# Altium PCB bq RepRap LCD SmartController_ConnectorAdapter.PcbDoc
Units mm, origin at the board's own origin, x right, y up, seen from the top; angles counter-clockwise.
Board outline 62.93 x 20.9 mm, 2 copper layers (Top Layer, Bottom Layer); 4 components, 17 nets, 48 pads, 6 vias.
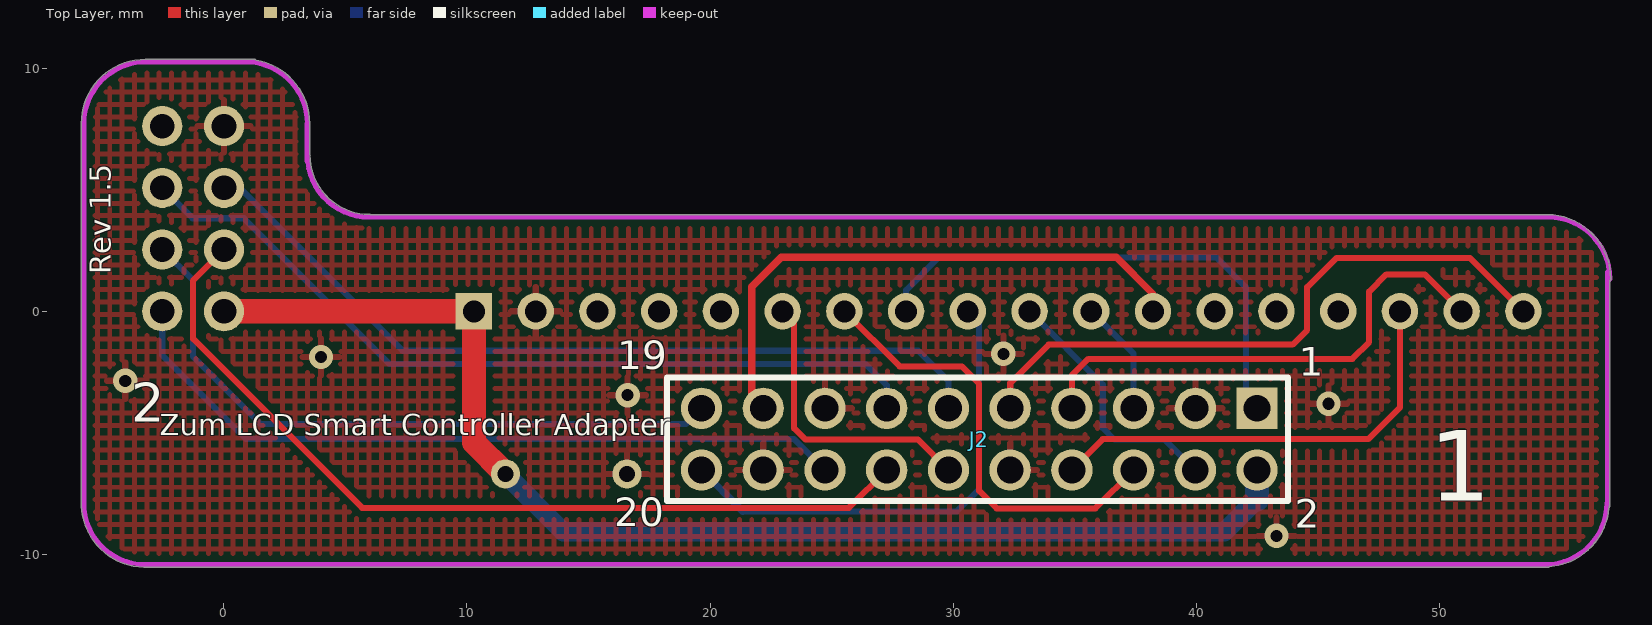
[diagram p0: Top Layer view]
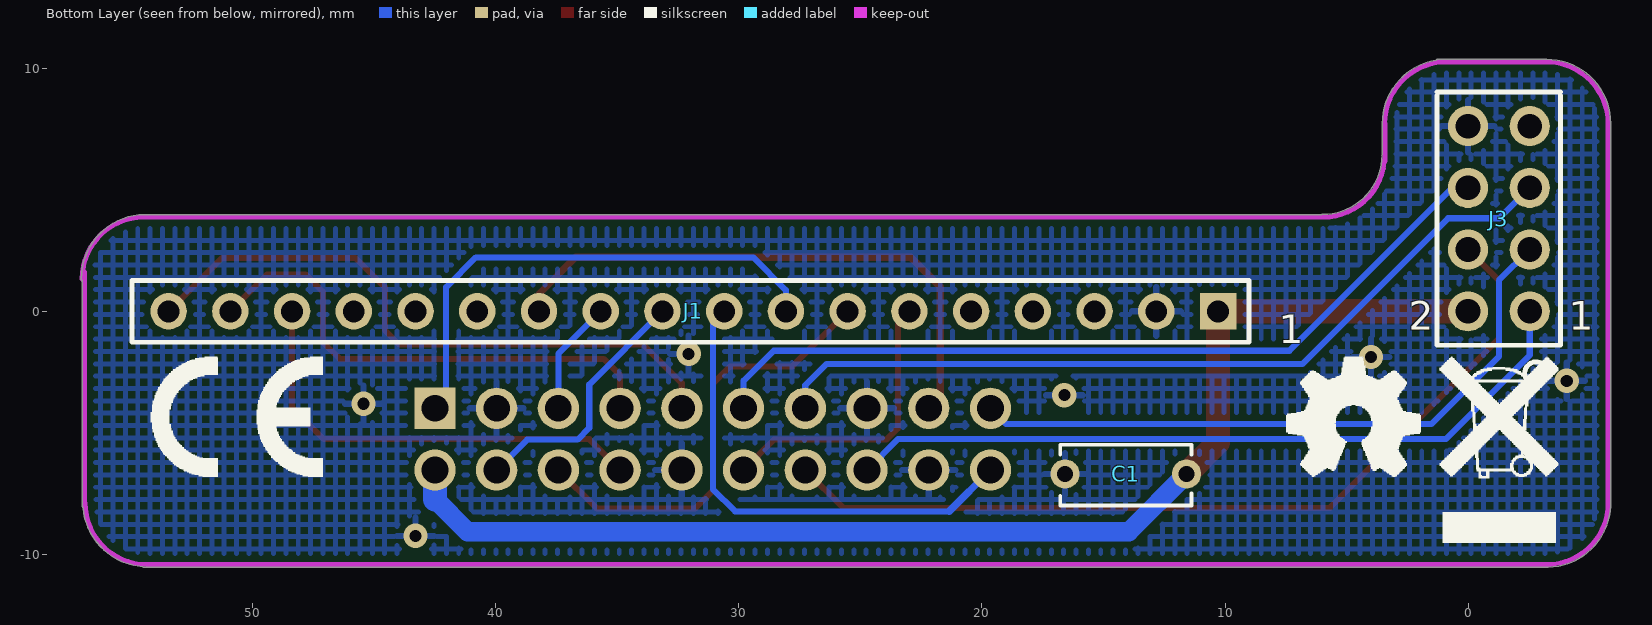
[diagram p1: Bottom Layer view, seen from below]
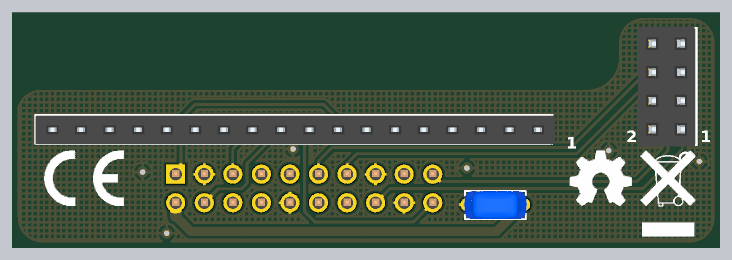
[diagram p2: 3D render of the assembled board from below, using the file's embedded part models]

## Layer stack, top to bottom
Top Solder: solder mask 0.0102, Solder Resist, Dk 3.5
Top Layer: signal copper 0.0356
Dielectric 1: dielectric 0.32, FR-4, Dk 4.8
Bottom Layer: signal copper 0.0356
Bottom Solder: solder mask 0.0102, Solder Resist, Dk 3.5

## Board outline
-5.868,-8.002 cw(c-5.77,-7.98) -5.87,-7.98 -5.87,7.72 cw(c-5.77,7.72) -5.87,7.725 cw(c-5.77,7.73) -5.87,7.73 cw(c-3.23,7.73) -3.23,10.37 cw(c-3.23,10.27) -3.225,10.37 cw(c-3.22,10.27) -3.22,10.37 1.24,10.37 cw(c1.24,10.27) 1.317,10.334 cw(c0.88,7.73) 3.52,7.73 3.52,6.49 cw(c3.44,6.43) 3.54,6.43 ccw(c5.98,6.43) 5.98,3.99 cw(c5.98,3.89) 6.024,3.98 54.45,3.98 cw(c54.45,3.88) 54.457,3.98 cw(c54.42,1.34) 57.06,1.34 cw(c56.96,1.34) 57.02,1.26 57.02,-8.008 cw(c56.92,-8.008) 56.981,-8.088 cw(c54.35,-7.87) 54.538,-10.504 cw(c54.47,-10.43) 54.47,-10.53 -3.28,-10.53 cw(c-3.28,-10.43) -3.292,-10.53 cw(c-3.23,-7.89)

## Design rules (kind name [scope] priority, off if disabled: settings)
Clearance Clearance_1 [All] p1: gap=0.254
Clearance Clearance_KO [OnLayer('Keep-Out Layer')] p2: gap=1
PolygonConnect [All] p1: connectstyle=Relief reliefconductorwidth=0.254 reliefentries=4 polygonreliefangle="90 Angle" airgapwidth=0.254
RoutingVias [All] p1: holewidth=0.711 width=1.27 viastyle="Through Hole" minholewidth=0.711 minwidth=1.27 maxholewidth=0.711 maxwidth=1.27
SilkToBoardRegionClearance [All] p1 off:
SilkToSolderMaskClearance [IsPad] p1: minsilkscreentomaskgap=0 clearancetoexposedcopper=TRUE
SolderMaskExpansion [All] p1: expansion=0.102
Width [All] p1: maxlimit=3 minlimit=0.2 preferedwidth=0.254
28 further rules are at their usual default settings.

## Components (designator, comment, footprint, x,y, rotation, side; value= is the part's Value field where it differs from the comment)
C1 "Capacitor" CAP5,50x3,50 14.08,-6.69 r180 bottom
J1 "1x18 Socket Header 2.54mm" "1x18 Socket Header THT 2.54mm" 10.287,0 r0 bottom
J2 "2x10 pin Header 2.54mm" "2x10 pin Header 2.54" 42.51,-3.99 r180 top
J3 "2x4 Box Header 2.54mm" "2x4 Box Header THD 2.54mm" -2.54,0 r90 bottom

## Footprints (in the part's own frame and the unit in brackets; to place one, negate y for a bottom-side part, rotate by r counter-clockwise, add the part's x,y. Pads: shape width x height; smd on the part's side, far side on the other; paste and mask are expansions set on the pad)
"1x18 Socket Header THT 2.54mm" [mm] "18 Socket Header pitch 2.54mm"
  rect 1.5x1.5 hole 0.9: 1(0,0)
  round 1.5 hole 0.9: 2(2.54,0) 3(5.08,0) 4(7.62,0) 5(10.16,0) 6(12.7,0) 7(15.24,0) 8(17.78,0) 9(20.32,0) 10(22.86,0) 11(25.4,0) 12(27.94,0) 13(30.48,0) 14(33.02,0) 15(35.56,0) 16(38.1,0) 17(40.64,0) 18(43.18,0)
  silkscreen extent -1.27,-1.27 44.69,1.27, body extent -1.52,-1.21 44.7,1.29, height 8.55
"2x4 Box Header THD 2.54mm" [mil]
  round 65 hole 40: 1(0,0) 2(0,100) 3(100,0) 4(100,100) 5(200,0) 6(200,100) 7(300,0) 8(300,100)
  silkscreen extent -118,-50 355,150, body extent -60,-45 360,155, height 337
"2x10 pin Header 2.54" [mm] "20 dual pin Header pitch 2.54mm"
  rect 1.7x1.7 hole 1.1: 1(0,0)
  round 1.7 hole 1.1: 2(0,2.54) 3(2.54,0) 4(2.54,2.54) 5(5.08,0) 6(5.08,2.54) 7(7.62,0) 8(7.62,2.54) 9(10.16,0) 10(10.16,2.54) 11(12.7,0) 12(12.7,2.54) 13(15.24,0) 14(15.24,2.54) 15(17.78,0) 16(17.78,2.54) 17(20.32,0) 18(20.32,2.54) 19(22.86,0) 20(22.86,2.54)
  silkscreen extent -1.27,-1.27 24.28,3.81, body extent -1.26,-1.32 24.14,3.76, height 8.77
CAP5,50x3,50 [mm] "CAP5,50x3,50"
  round 1.2 hole 0.65: 1(-2.5,0) 2(2.5,0)
  silkscreen extent -2.7,-1.3 2.7,1.2, body extent -2.75,-1.3 2.75,1.2, height 4.5

## Part data
C1: library part 100nF_50V_±10%
J1: library part CON_SH_THT2.54_18, "Connector, 18 pin Socket Header 2.54mm"
J2: library part CON_DPH_THT2.54_20, "20 pin Dual Header 2.54mm"
J3: library part CON_DBH_THD_2.54_8, "Connector, 8 Pin Box Dual Header 2.54mm"

## Via types
v1: diameter 1, hole 0.5, Top Layer to Bottom Layer, 6 vias

## Nets (pads, with @x,y where several pads share a name; then routed paths per layer and width w, separated by ;. In a path a pad name is that pad's centre, name@x,y a point inside that pad or via, vN(x,y) a via of type N, cw(c..) or ccw(c..) an arc to the next point about the centre after c; other vN are vias at no path point)
BTN_ENC: J1.10 J2.4 | length 10.6
  Bottom Layer w0.254: J1.10 36.16,-3.013 36.16,-4.8 36.64,-5.28 38.72,-5.28 J2.4
BUZZ: J1.9 J2.20 | length 20
  Bottom Layer w0.254: 21.35,-8.23 30.16,-8.23 31.07,-7.32 31.07,-0.463 J1.9
  Bottom Layer w0.3: J2.20 21.35,-8.23
CNTRST: J1.8 J2.1 | length 20.4
  Bottom Layer w0.254: J1.8 28.067,0.877 29.41,2.22 40.82,2.22 42.05,0.99 J2.1@42.05,-3.53
ENC1: J1.12 J2.17 | length 23.5
  Top Layer w0.3: J2.17 21.72,-3.52 21.72,1.01 22.93,2.22 36.722,2.22 38.227,0.715 J1.12
ENC3: J1.11 J2.5 | length 4.7
  Bottom Layer w0.254: J1.11 37.43,-1.743 J2.5
GND: C1.1 J1.2 J2.3 J2.10 J2.15 J2.18 J3.8
  other v1: 43.31,-9.24 45.45,-3.8 16.61,-3.45 -4.06,-2.86 3.99,-1.88 32.07,-1.75
LCD_CS: J1.18 J2.9 | length 26.2
  Top Layer w0.254: J2.9 32.35,-2.95 33.93,-1.37 43.97,-1.37 44.57,-0.77 44.57,0.99 45.78,2.2 51.267,2.2 J1.18
LCD_RST: J1.6 J2.12 | length 12.1
  Top Layer w0.254: J1.6 23.46,-0.473 23.46,-4.81 23.93,-5.28 28.56,-5.28 J2.12
LCD_SCK: J1.16 J2.8 | length 18.5
  Top Layer w0.254: J2.8 36.16,-5.26 47.09,-5.26 48.387,-3.963 J1.16
LCD_SDA: J1.17 J2.7 | length 20.4
  Top Layer w0.254: J2.7 34.89,-2.64 35.57,-1.96 46.427,-1.96 47.12,-1.267 47.12,0.81 47.83,1.52 49.415,1.52 J1.17@50.555,0.38
RST_BUT: J1.7 J2.6 | length 18.5
  Top Layer w0.254: J1.7 27.797,-2.27 30.36,-2.27 31.07,-2.98 31.07,-7.38 31.8,-8.11 35.85,-8.11 J2.6
SD_CLK: J2.11 J3.6 | length 34.2
  Bottom Layer w0.254: J3.6 0.65,5.08 7.35,-1.62 28.57,-1.62 29.81,-2.86 J2.11
SD_CS: J2.13 J3.5 | length 34.1
  Bottom Layer w0.254: J3.5 -1.29,3.83 0.82,3.83 6.82,-2.17 26.4,-2.17 27.27,-3.04 J2.13
SD_DIN: J2.19 J3.3 | length 27.3
  Bottom Layer w0.254: J3.3 -1.27,1.27 -1.27,-1.86 1.51,-4.64 19,-4.64 J2.19
SD_R_CD: J2.16 J3.1 | length 31
  Bottom Layer w0.254: J3.1 -2.54,-1.8 0.92,-5.26 23.46,-5.26 J2.16
SD_R_DOUT: J2.14 J3.4 | length 36.4
  Top Layer w0.254: J3.4@0,2.413 J3.4 -1.27,1.27 -1.27,-1.13 5.69,-8.09 25.71,-8.09 J2.14
VCC_5V: C1.2 J1.1 J2.2 J3.2 | length 51.2
  Top Layer w1: J3.2 J1.1 10.287,-5.397 C1.2
  Bottom Layer w0.8: C1.2 13.96,-9.07 41.17,-9.07 42.51,-7.73
  Bottom Layer w1: 42.51,-7.73 J2.2
pads on no net: J1.3 J1.4 J1.5 J1.13 J1.14 J1.15 J3.7

## Polygon pours and split planes (outlines as drawn)
GND on Bottom Layer "GND" (hatched 90Degree grid 0.508 track 0.203, remove dead copper, pour order 12): -30.389,21.27 -30.431,21.351 -30.47,-15.88 -12.034,-16.04 -5.527,-22.18 91.075,-22.18 93.66,-19.63 93.69,-17.06 90.903,-14.35 83.838,-14.35 50.918,17.36 50.999,45.76 -17.861,45.76 -30.44,33.6
GND on Top Layer "gndplane" (hatched 90Degree grid 0.508 track 0.203, remove dead copper, pour order 11): -7.7,11.29 -7.7,-10.73 -5.61,-12.82 -4.91,-12.12 56.26,-12.12 56.26,-11.32 58.55,-9.03 58.85,-8.73 58.85,5.06 8.79,5.06 2.46,11.39

## Keep-outs
Keep-Out Layer:
  lines w0.2: -5.77,-7.88 ccw(c-3.23,-7.88) -3.23,-10.42 ; -5.76,-8.008 -5.76,7.71 ; -5.76,7.72 cw(c-3.22,7.72) -3.22,10.26 ; -3.39,-10.42 54.36,-10.42 ccw(c54.36,-7.88) 56.9,-7.88 ; -3.21,10.26 1.25,10.26 ; 0.89,10.26 cw(c0.89,7.72) 3.43,7.72 ; 3.42,6.191 3.42,7.73 ; 3.43,6.41 ccw(c5.97,6.41) 5.97,3.87 54.49,3.87 cw(c54.49,1.33) 57.03,1.33 ; 56.93,-7.88 56.93,1.63

## Silkscreen, mask and mechanical layers (free items; w line width, h text height)
Top Overlay:
  text "Rev 1.5" at -4.38,1.53 h1.5 r90
  text "19" at 16.187,-2.777 h2
  text "1" at 44.23,-3.04 h2
  text "2" at -3.82,-5.05 h2.7
  text "Zum LCD Smart Controller Adapter" at -2.64,-5.39 h1.5
  text "1" at 49.59,-8.77 h5
  text "20" at 16.062,-9.24 h2
  text "2" at 44.06,-9.3 h2
Bottom Overlay:
  drawing of 1330 lines, arcs and shapes, not listed
  text "1" at -4.15,-1.14 h2
  text "2" at 2.44,-1.14 h2
  text "1" at 7.793,-1.701 h2
Mechanical 1:
  lines w0.2: -5.77,-7.98 -5.77,7.72 ; -5.77,-7.89 ccw(c-3.23,-7.89) -3.23,-10.43 ; -5.77,7.73 cw(c-3.23,7.73) -3.23,10.27 ; -3.28,-10.43 54.47,-10.43 ; -3.22,10.27 1.24,10.27 ; 0.88,10.27 cw(c0.88,7.73) 3.42,7.73 3.42,6.191 ; 3.44,6.43 ccw(c5.98,6.43) 5.98,3.89 ; 5.93,3.88 54.45,3.88 ; 54.35,-10.41 ccw(c54.35,-7.87) 56.89,-7.87 ; 54.42,3.88 cw(c54.42,1.34) 56.96,1.34 ; 56.92,-8.008 56.92,1.438

## Dimensions
-5.77,-7.98 to 56.92,1.438 on Mechanical 1
1.24,10.27 to -3.28,-10.43 on Mechanical 1
-5.77,-7.98 to 3.42,7.73 on Mechanical 1